# Altium PCB smartport_inverter.PcbDoc
Units mm, origin at the board's own origin, x right, y up, seen from the top; angles counter-clockwise.
Board outline 14 x 12 mm, 2 copper layers (Top Layer, Bottom Layer), stack 1.57 mm thick; 6 components, 6 nets, 17 pads, 3 vias.
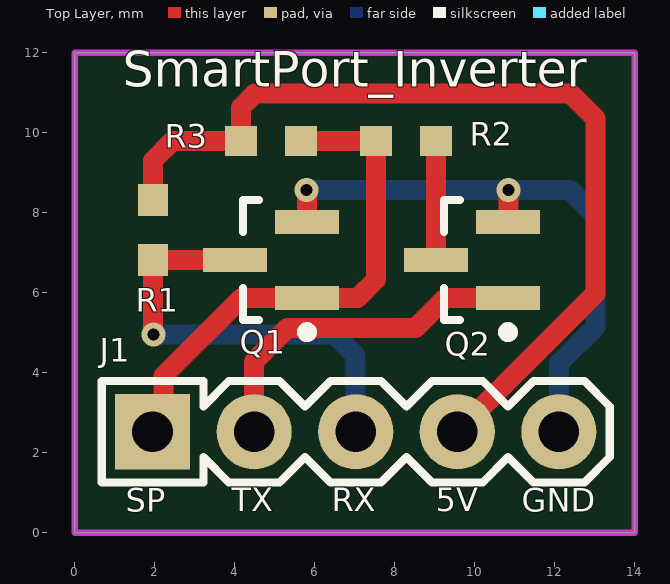
[diagram p0: Top Layer view]
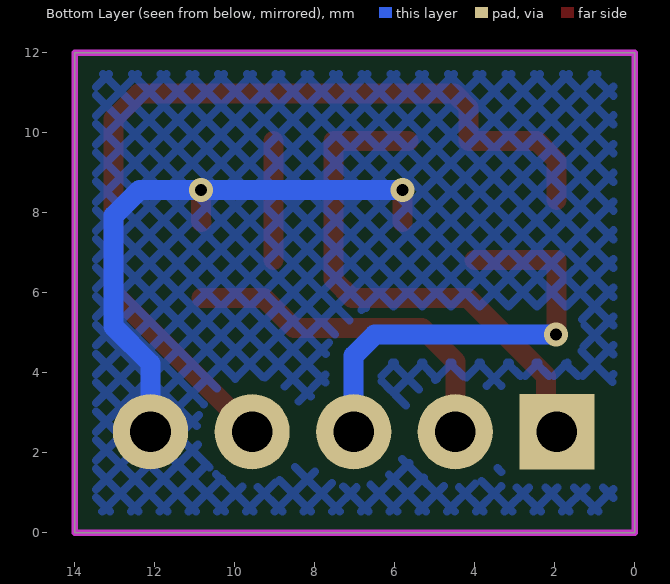
[diagram p1: Bottom Layer view, seen from below]
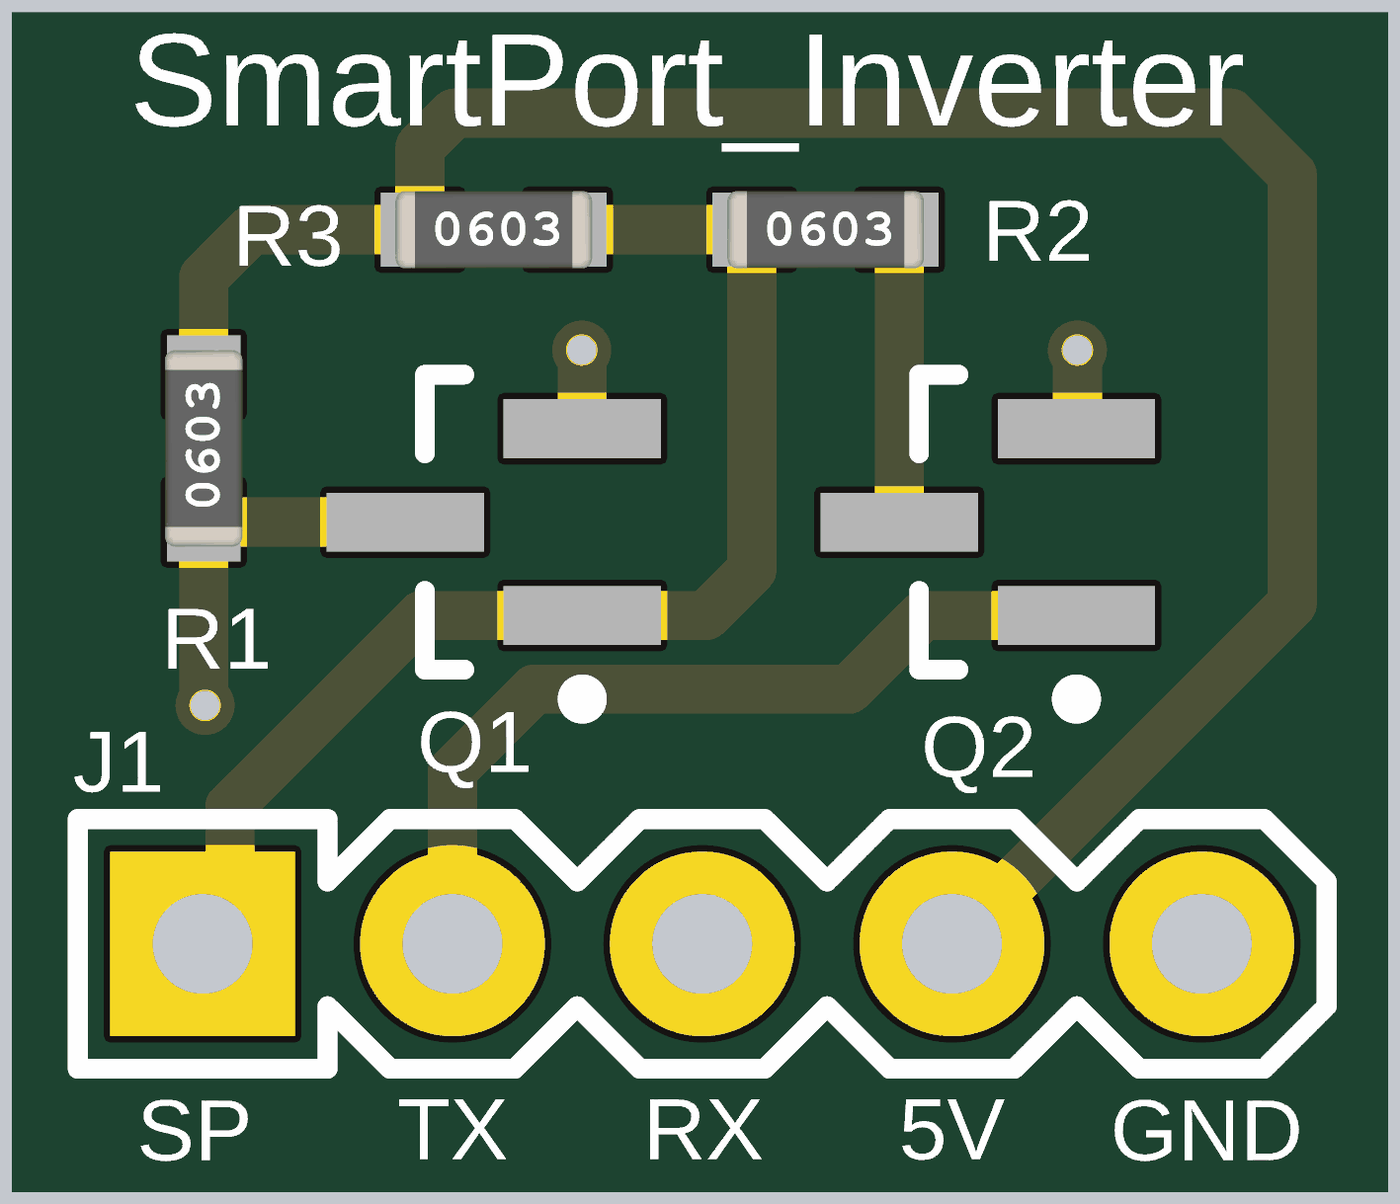
[diagram p2: 3D render of the assembled board from above, using the file's embedded part models]

## Layer stack, top to bottom
Top Solder: solder mask 0.0102, Solder Resist, Dk 3.5
Top Layer: signal copper 0.035
Dielectric: core 1.5, FR-4, Dk 4.8
Bottom Layer: signal copper 0.035
Bottom Solder: solder mask 0.0102, Solder Resist, Dk 3.5

## Board outline
0,0 0,12 14,12 14,0

## Design rules (kind name [scope] priority, off if disabled: settings)
Clearance [All] p1: gap=0.35 ignorepadtopadclearanceinfootprint=FALSE except(0: Arc-Hole Track-THPad Track-Hole SMDPad-Hole THPad-Hole Via-Hole Fill-Hole Poly-Hole Region-Hole Text-Hole; 0.2: Arc-Arc Arc-Track Arc-SMDPad Arc-THPad Arc-Via Track-Track Track-SMDPad Track-Via SMDPad-SMDPad SMDPad-THPad SMDPad-Via THPad-THPad THPad-Via Via-Via)
ComponentClearance [All] p1: gap=0.25 collisioncheckmode=3 verticalgap=0 showdistances=FALSE
DiffPairsRouting [All] p1: maxlimit=0.16 minlimit=0.1 mostfreqgap=0.1 toplayer_minwidth=0.16 toplayer_maxwidth=0.5 toplayer_prefwidth=0.2 bottomlayer_minwidth=0.16 bottomlayer_maxwidth=0.5 bottomlayer_prefwidth=0.2 maxuncoupledlength=12.7
Height [All] p1: minheight=0 maxheight=20 prefheight=10
HoleSize HoleSize_BGA [isVia And WithinRoom('MCU_IO')] p1: absolutevalues=TRUE maxlimit=2.5 minlimit=0.1 maxpercent=80.000 minpercent=20.000
HoleSize [All] p2: absolutevalues=TRUE maxlimit=15 minlimit=0.2 maxpercent=80.000 minpercent=20.000
HoleToHoleClearance [All] p1: gap=0.4 allowstackedmicrovias=TRUE
MatchedLengths MD_MatchedLengths [InNetClass('MD')] p1: tolerance=2 checknetsindiffpair=FALSE checkdiffpairvsdiffpair=TRUE checkxsignals=TRUE checkothers=TRUE
MatchedLengths SD_MatchedLengths [InNetClass('SD')] p2: tolerance=8 checknetsindiffpair=FALSE checkdiffpairvsdiffpair=TRUE checkxsignals=TRUE checkothers=TRUE
MatchedLengths SSD_MatchedLengths [InNetClass('SSD')] p3: tolerance=10 checknetsindiffpair=FALSE checkdiffpairvsdiffpair=TRUE checkxsignals=TRUE checkothers=TRUE
MatchedLengths XIP_MatchedLengths [InNetClass('XIP')] p4: tolerance=10 checknetsindiffpair=FALSE checkdiffpairvsdiffpair=TRUE checkxsignals=TRUE checkothers=TRUE
MatchedLengths Flash [InNetClass('Flash')] p5: tolerance=1.27 checknetsindiffpair=FALSE checkdiffpairvsdiffpair=TRUE checkxsignals=TRUE checkothers=TRUE
MatchedLengths DiffPair_ETHMatchedLengths [InDifferentialPairClass('DP_ETH')] p6: tolerance=2.3 checknetsindiffpair=TRUE checkdiffpairvsdiffpair=FALSE checkxsignals=FALSE checkothers=FALSE
MatchedLengths RMII_MatchedLengths [InNetClass('RMII')] p7: tolerance=8 checknetsindiffpair=FALSE checkdiffpairvsdiffpair=TRUE checkxsignals=TRUE checkothers=TRUE
MatchedLengths DiffPair_DP_USBMatchedLengths [InDifferentialPair ('USB_D')] p8: tolerance=14.2 checknetsindiffpair=TRUE checkdiffpairvsdiffpair=FALSE checkxsignals=FALSE checkothers=FALSE
MinimumAnnularRing "MinimumAnnularRing Mid-Layer 1" [OnLayer('Mid-Layer 1')] p1: minimumring=0.35
MinimumAnnularRing "MinimumAnnularRing Mid-Layer 2" [OnLayer('Mid-Layer 2')] p2: minimumring=0.35
MinimumAnnularRing [All] p3: minimumring=0.1
MinimumSolderMaskSliver [All] p1: minsoldermaskwidth=0.07
NetAntennae NetAntennae_JTAG [InNetClass('JTAG')] p1: netantennaetolerance=20
NetAntennae [All] p2: netantennaetolerance=0
PlaneClearance [All] p1: clearance=0.5
PlaneConnect [All] p1: planeconnectstyle=Relief reliefexpansion=0.5 reliefentries=4 reliefconductorwidth=0.25 reliefairgap=0.25
PolygonConnect [All] p1: connectstyle=Direct reliefconductorwidth=0.4 reliefentries=4 polygonreliefangle="90 Angle" airgapwidth=0.254
RoomDefinition smartport_inverter [InComponentClass('smartport_inverter')] p1: confinementstyle=ConfineIn formatcopy=TRUE lockcomponents=FALSE outline -1083.094,-419.654 -1032.294,-419.654 -1032.294,-394.254 -1083.094,-394.254
RoutingCorners [All] p1: cornerstyle=45-Degree minsetback=2 maxsetback=2
RoutingVias [All] p1: holewidth=0.3 width=0.8 viastyle="Through Hole" minholewidth=0.25 minwidth=0.48 maxholewidth=0.3 maxwidth=0.8
SilkToSilkClearance [All] p1: silktosilkclearance=0.25
SilkToSolderMaskClearance SilkscreenOverComponentPads [IsPad] p1: minsilkscreentomaskgap=0.25 clearancetoexposedcopper=TRUE
SolderMaskExpansion ISVIA [IsVia] p1: expansion=0.15 istentingtop=FALSE
SolderMaskExpansion [All] p2: expansion=0.065 istentingtop=FALSE
Width Width_BGA [WithinRoom('BGA')] p1: maxlimit=1 minlimit=0.1 preferedwidth=0.15 minimp=50.000000 maximp=50.000000 favimp=50.000000
Width [All] p2: maxlimit=5 minlimit=0.1 preferedwidth=0.15 minimp=50.000000 maximp=50.000000 favimp=50.000000
18 further rules are at their usual default settings.

## Components (designator, comment, footprint, x,y, rotation, side; value= is the part's Value field where it differs from the comment)
J1 "61300511121" 61300511121 1.945,2.525 r0 top
Q1 "2N7002-7-F" SOT23-3N 4.905,6.815 r180 top
Q2 "2N7002-7-F" SOT23-3N 9.93,6.815 r180 top
R1 "4.7k" R0603 1.955,7.565 r90 top
R2 "4.7k" R0603 8.28,9.79 r0 top
R3 "47k" R0603 4.905,9.79 r0 top

## Footprints (in the part's own frame and the unit in brackets; to place one, negate y for a bottom-side part, rotate by r counter-clockwise, add the part's x,y. Pads: shape width x height; smd on the part's side, far side on the other; paste and mask are expansions set on the pad)
61300511121 [mil]
  rect 74x74 / inner round 74 / far side rect 74x74 hole 40: 1(0,0)
  round 74 hole 40: 2(100,0) 3(200,0) 4(300,0) 5(400,0)
  silkscreen extent -50,-50 450,50
R0603 [mm] "RESISTOR SMD 0603"
  rect 0.8x0.75 smd: 1(-0.75,0) 2(0.75,0)
  body extent -1,-0.39 1,0.39, height 0.79
SOT23-3N [mm] "SOT23, 3-Leads, Body 3.0x2.6mm (max), Pitch 0.95mm, IPC Medium Density"
  rect 1.6x0.6 smd: 1(-0.9,0.95) 2(-0.9,-0.95) 3(0.9,0)
  silkscreen extent -1.03,-1.5 0.7,1.92, body extent -1.47,-1.5 1.47,1.5, height 1.1

## Part data
J1: "Headers & Wire Housings WR-PHD 2.54mm Hdr 5P Single Str Gold", Manufacturer="Wurth Elektronik", Manufacturer Part Number=61300511121
Q1 Q2: "MOSFET N-CH 60V 200MA SOT23-3", Manufacturer="Diodes Incorporated", Manufacturer Part Number=2N7002-7-F
R1 R2: library part RES_YAG_RC0603FR-074K7L, "Resistor 4.7k 0603 +-1% 0.1", Manufacturer=Yageo, Manufacturer Part Number=RC0603FR-074K7L, Operating Temperature="-55°C to +155°C", Package / Case=0603, Power (Watts)=0.1, Temperature Coefficient=+-200ppm°C, Tolerance=+-1%, Voltage (V)=75, Category=Resistor, Part Number=RES_YAG_RC0603FR-074K7L, Resistor (Ohms)=4.7k, Thickness (mm)=0.45
R3: library part RES_YAG_RC0603FR-0747KL, "Resistor 47k 0603 +-1% 0.1", Manufacturer=Yageo, Manufacturer Part Number=RC0603FR-0747KL, Operating Temperature="-55°C to +155°C", Package / Case=0603, Power (Watts)=0.1, Temperature Coefficient=+-200ppm°C, Tolerance=+-1%, Voltage (V)=75, Category=Resistor, Part Number=RES_YAG_RC0603FR-0747KL, Resistor (Ohms)=47k, Thickness (mm)=0.45

## Via types
v1: diameter 0.6, hole 0.3, Top Layer to Bottom Layer, tented both sides, 3 vias

## Nets (pads, with @x,y where several pads share a name; then routed paths per layer and width w, separated by ;. In a path a pad name is that pad's centre, name@x,y a point inside that pad or via, vN(x,y) a via of type N, cw(c..) or ccw(c..) an arc to the next point about the centre after c; other vN are vias at no path point)
5V: J1.4 R1.2 R3.1 | length 22.8
  Top Layer w0.5: R1.2 1.955,9.305 2.44,9.79 R3.1 4.155,10.63 4.5,10.975 12.4,10.975 13.025,10.35 13.025,5.985 J1.4
GND: J1.5 Q1.2 Q2.2 | length 14.9
  Top Layer w0.5: Q1.2 v1@5.805,8.605 ; Q2.2 10.84,7.775 v1(10.84,8.565)
  Bottom Layer w0.5: v1(5.8,8.565) v1(10.84,8.565) 12.385,8.565 13.025,7.925 13.025,5.15 12.105,4.23 J1.5
NetQ2_3: Q2.3 R2.2 | length 3
  Top Layer w0.5: Q2.3 R2.2
RX: J1.3 Q1.3 R1.1 | length 11.1
  Top Layer w0.5: v1@1.975,4.95 1.955,4.97 R1.1 Q1.3
  Bottom Layer w0.5: v1(1.97,4.95) 6.5,4.95 7.025,4.425 J1.3
smartport: J1.1 Q1.1 R2.1 R3.2 | length 13.2
  Top Layer w0.5: J1.1 2.222,2.802 2.222,3.922 4.165,5.865 Q1.1 7.065,5.865 7.53,6.33 R2.1 R3.2
TX: J1.2 Q2.1 | length 8.8
  Top Layer w0.5: J1.2 4.485,4.285 5.315,5.115 8.515,5.115 9.265,5.865 Q2.1

## Polygon pours and split planes (outlines as drawn)
GND on Bottom Layer "GND_L02_P000" (hatched 45Degree grid 0.508 track 0.203, remove dead copper, pour order 0): 0,12 14,12 14,0 0,0

## Keep-outs
Keep-Out Layer:
  the board outline again, w0.152

## Silkscreen, mask and mechanical layers (free items; w line width, h text height)
Top Overlay:
  text "SmartPort_Inverter" at 1.2,10.85 h1.52
  text "SP" at 1.275,0.325 h1
  text "TX" at 3.925,0.336 h1
  text "RX" at 6.425,0.336 h1
  text "5V" at 9.025,0.336 h1
  text "GND" at 11.175,0.325 h1